# Altium PCB WiFiChessPCB.PcbDoc
Units mm, origin at the board's own origin, x right, y up, seen from the top; angles counter-clockwise.
Board outline 100 x 100 mm, 2 copper layers (Top Layer, Bottom Layer); 86 components, 76 nets, 360 pads, 231 vias.
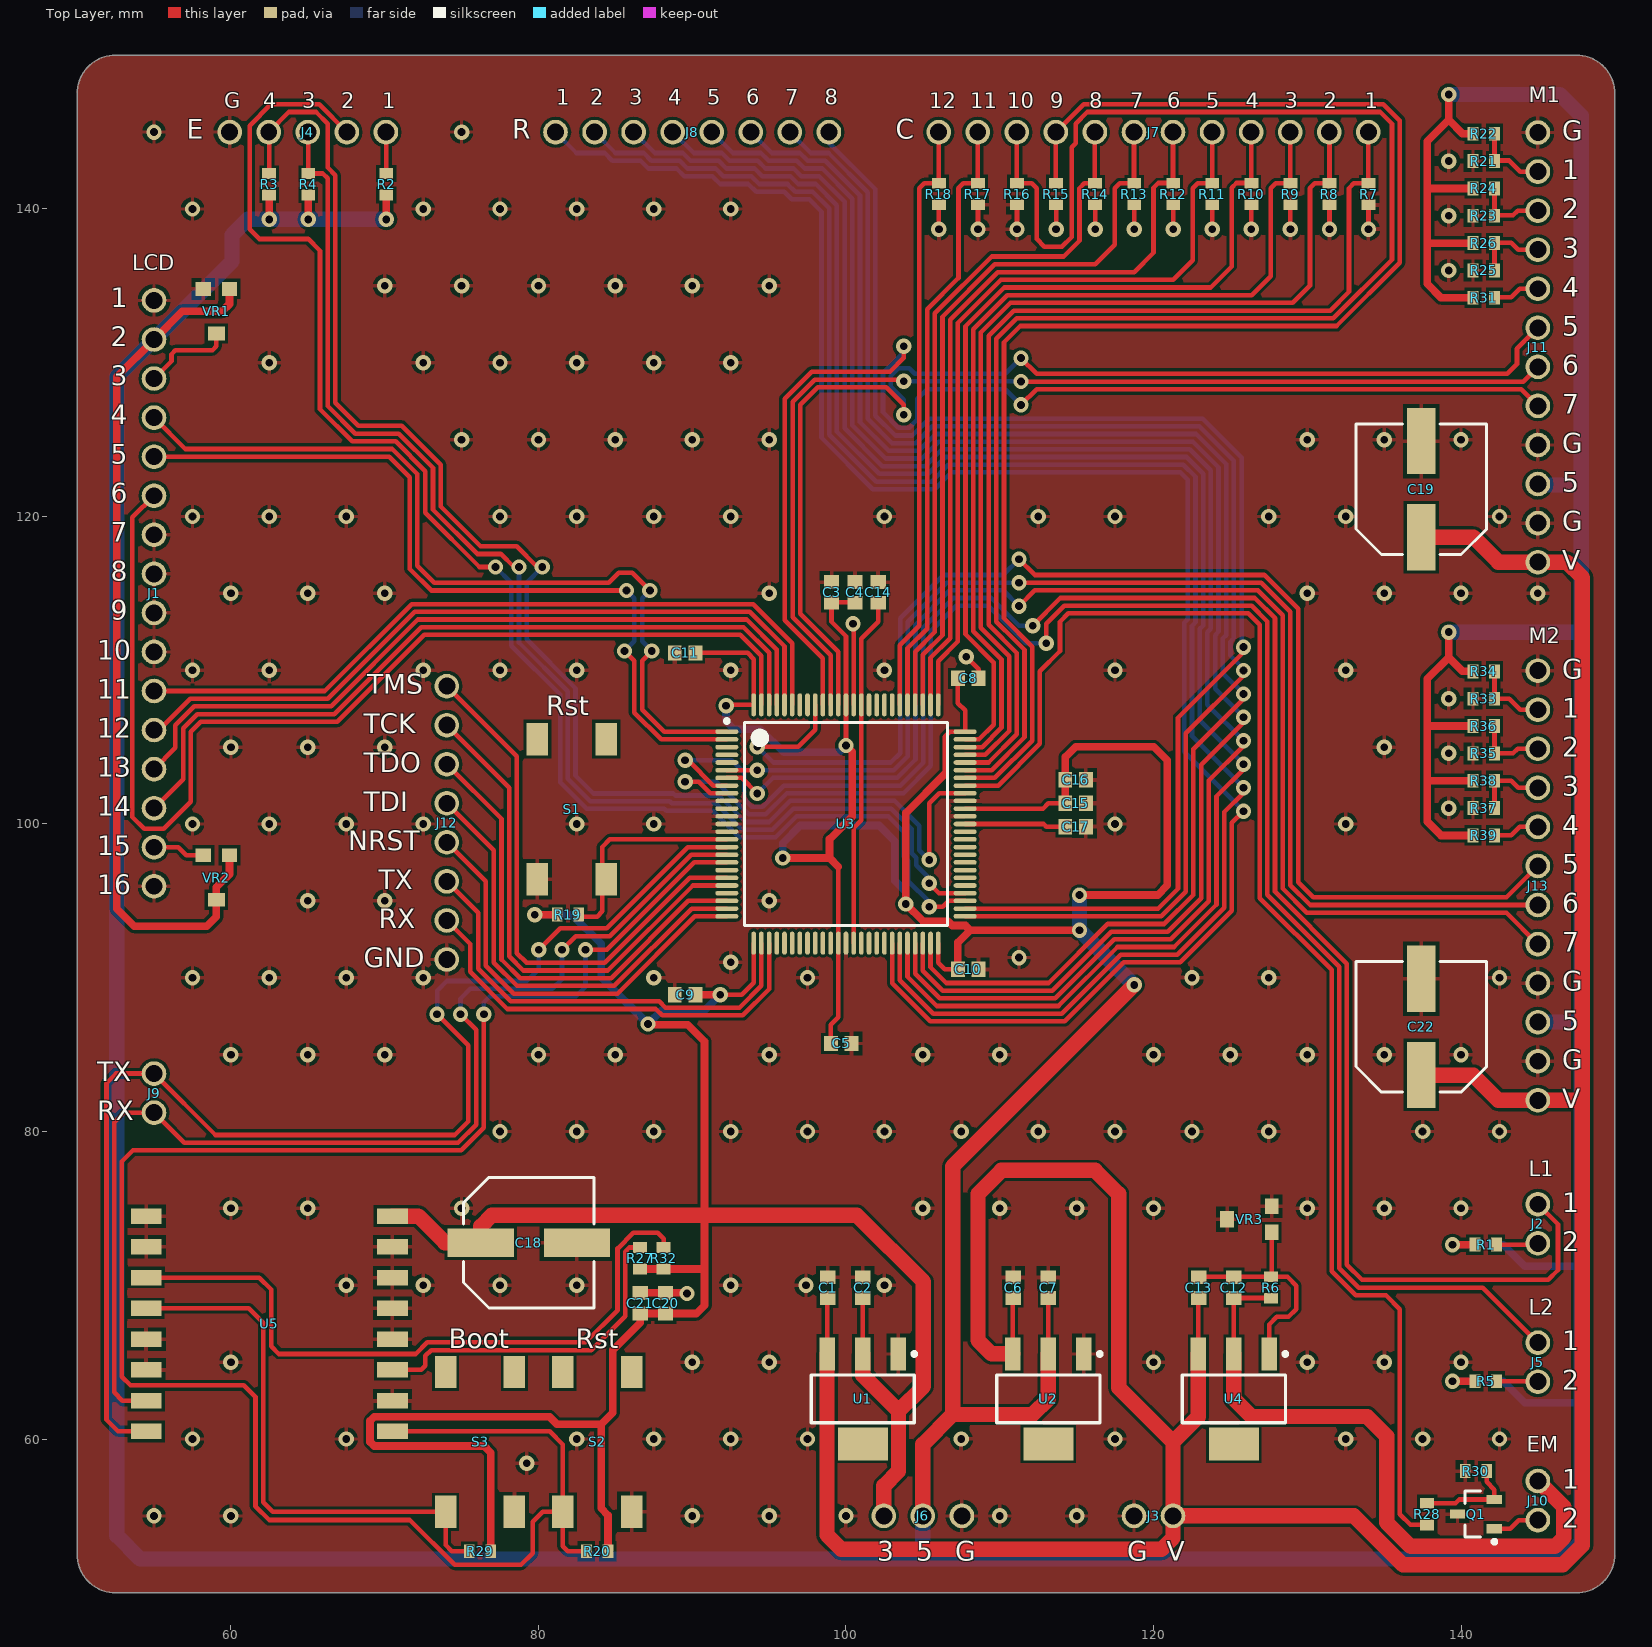
[diagram p0: Top Layer view]
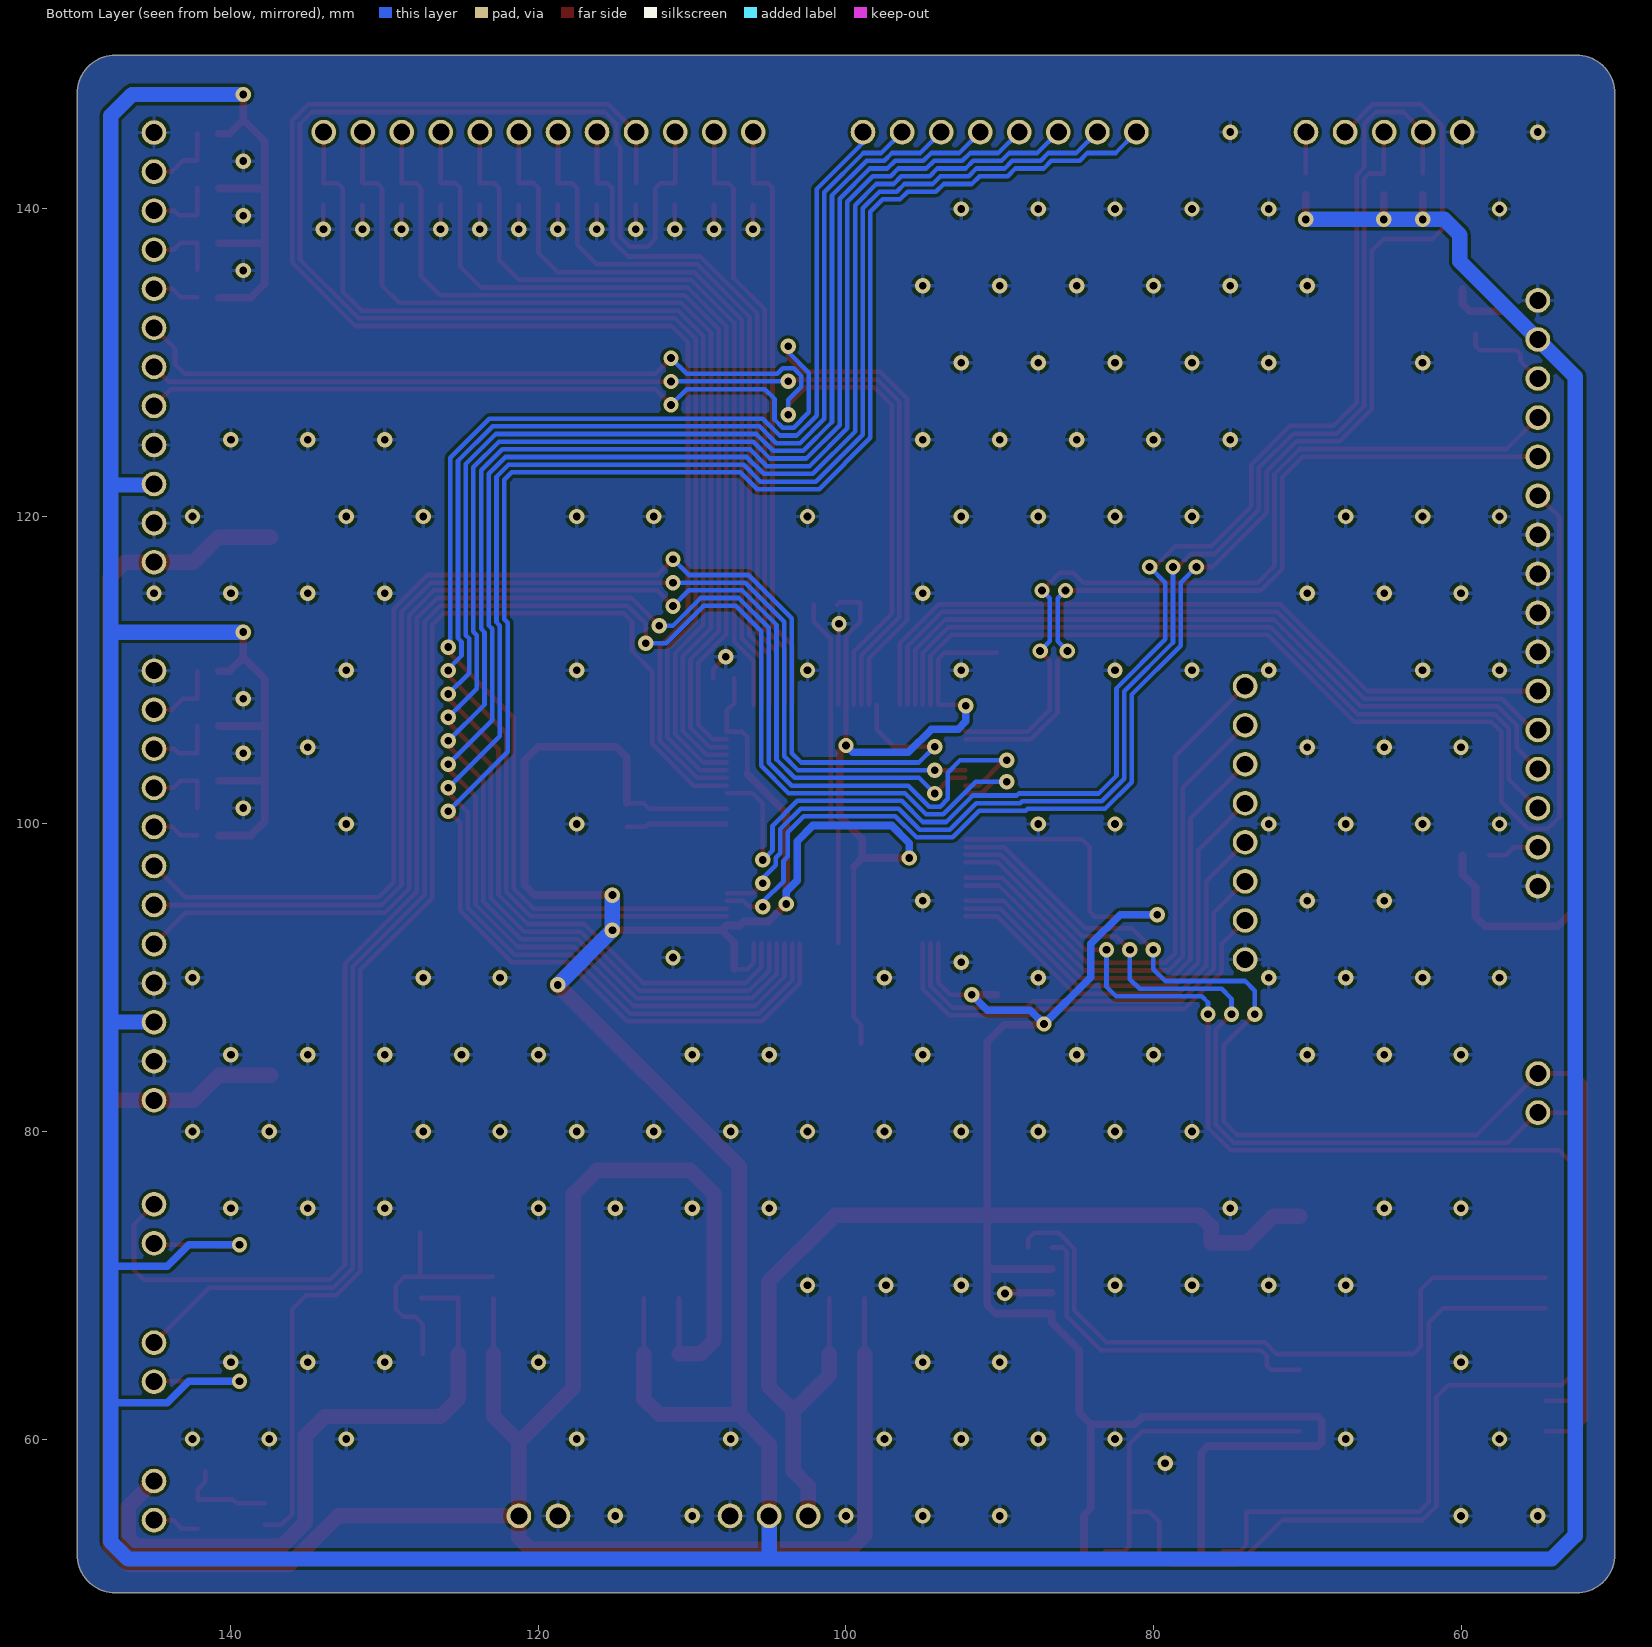
[diagram p1: Bottom Layer view, seen from below]

## Layer stack, top to bottom
Top Solder: solder mask 0.0102, Solder Resist, Dk 3.5
Top Layer: signal copper 0.0356
Dielectric 1: dielectric 0.32, FR-4, Dk 4.8
Bottom Layer: signal copper 0.0356
Bottom Solder: solder mask 0.0102, Solder Resist, Dk 3.5

## Board outline
50,52.5 50,147.5 cw(c52.5,147.5) 52.5,150 147.5,150 cw(c147.5,147.5) 150,147.5 150,52.5 cw(c147.5,52.5) 147.5,50 52.5,50 cw(c52.5,52.5)

## Design rules (kind name [scope] priority, off if disabled: settings)
Clearance [All] p1: gap=0.2
HoleSize [All] p1: absolutevalues=TRUE maxlimit=6.35 minlimit=0.3 maxpercent=80.000 minpercent=20.000
HoleToHoleClearance [All] p1: gap=0.25 allowstackedmicrovias=TRUE
MinimumSolderMaskSliver [All] p1: minsoldermaskwidth=0.125
PlaneClearance [All] p1: clearance=0.5
PlaneConnect [All] p1: planeconnectstyle=Relief reliefexpansion=0.5 reliefentries=4 reliefconductorwidth=0.25 reliefairgap=0.25
PolygonConnect [All] p1: connectstyle=Relief reliefconductorwidth=0.25 reliefentries=4 polygonreliefangle="90 Angle" airgapwidth=0.25
RoutingCorners [All] p1: cornerstyle=45-Degree minsetback=2.5 maxsetback=2.5
RoutingVias [All] p1: holewidth=0.5 width=1 viastyle="Through Hole" minholewidth=0.5 minwidth=1 maxholewidth=2 maxwidth=5
SilkToSilkClearance [All] p1: silktosilkclearance=0.125
SilkToSolderMaskClearance [IsPad] p1: minsilkscreentomaskgap=0.125 clearancetoexposedcopper=TRUE
SolderMaskExpansion [All] p1: expansion=0.1
Width [All] p1: maxlimit=3 minlimit=0.2 preferedwidth=0.3
22 further rules are at their usual default settings.

## Components (designator, comment, footprint, x,y, rotation, side; value= is the part's Value field where it differs from the comment)
C1 "10uF" CAP0603 98.806,69.85 r90 top
C2 "10uF" CAP0603 101.092,69.85 r270 top
C3 "1uF" CAP0603 99.06,115.062 r270 top
C4 "100nF" CAP0603 100.584,115.062 r270 top
C5 "100nF" CAP0603 99.695,85.725 r180 top
C6 "10uF" CAP0603 110.871,69.85 r90 top
C7 "10uF" CAP0603 113.157,69.85 r270 top
C8 "100nF" CAP0603 107.95,109.474 r180 top
C9 "100nF" CAP0603 89.535,88.9 r0 top
C10 "100nF" CAP0603 107.95,90.551 r180 top
C11 "100nF" CAP0603 89.535,111.125 r0 top
C12 "10uF" CAP0603 125.222,69.85 r270 top
C13 "10uF" CAP0603 122.936,69.85 r90 top
C14 "1uF" CAP0603 102.108,115.062 r270 top
C15 "1uF" CAP0603 114.935,101.346 r180 top
C16 "100nF" CAP0603 114.935,102.87 r180 top
C17 "1uF" CAP0603 114.935,99.822 r180 top
C18 "47uF" CAP_EL_8x5.9 79.375,72.771 r0 top
C19 "47uF" CAP_EL_8x5.9 137.414,121.777 r90 top
C20 "100nF" CAP0603 88.265,68.834 r270 top
C21 "1uF" CAP0603 86.614,68.834 r270 top
C22 "47uF" CAP_EL_8x5.9 137.414,86.812 r90 top
J1 "Header_16" "16 Pin Header 2.54mm" 55,115 r270 top
J2 "Header_2" "2 Pin Header 2.54mm" 145,74 r90 top
J3 "Header_2" "2 Pin Header 2.54mm" 120,55 r180 top
J4 "Header_5" "5 Pin Header 2.54mm" 65,145 r180 top
J5 "Header_2" "2 Pin Header 2.54mm" 145,65 r90 top
J6 "Header_3" "3 Pin Header 2.54mm" 105,55 r0 top
J7 "Header_12" "12 Pin Header 2.54mm" 120,145 r180 top
J8 "Header_8" "8 Pin Header 2.54mm" 90,145 r0 top
J9 "Header_2" "2 Pin Header 2.54mm" 55,82.5 r270 top
J10 "Header_2" "2 Pin Header 2.54mm" 145,56 r270 top
J11 "Header_12" "12 Pin Header 2.54mm" 145,131 r270 top
J12 "Header_8" "8 Pin Header 2.54mm" 74.041,100.076 r270 top
J13 "Header_12" "12 Pin Header 2.54mm" 145,96 r270 top
Q1 "PMV20ENR" SOT23 140.97,55.118 r180 top
R1 "10K" RES0603 141.605,72.644 r180 top
R2 "10K" RES0603 70.104,141.605 r270 top
R3 "10K" RES0603 62.484,141.605 r270 top
R4 "10K" RES0603 65.024,141.605 r270 top
R5 "10K" RES0603 141.605,63.754 r180 top
R6 "100R" RES0603 127.635,69.85 r270 top
R7 "10K" RES0603 133.985,140.97 r90 top
R8 "10K" RES0603 131.445,140.97 r90 top
R9 "10K" RES0603 128.905,140.97 r90 top
R10 "10K" RES0603 126.365,140.97 r90 top
R11 "10K" RES0603 123.825,140.97 r90 top
R12 "10K" RES0603 121.285,140.97 r90 top
R13 "10K" RES0603 118.745,140.97 r90 top
R14 "10K" RES0603 116.205,140.97 r90 top
R15 "10K" RES0603 113.665,140.97 r90 top
R16 "10K" RES0603 111.125,140.97 r90 top
R17 "10K" RES0603 108.585,140.97 r90 top
R18 "10K" RES0603 106.045,140.97 r90 top
R19 "10K" RES0603 81.915,94.107 r180 top
R20 "10K" RES0603 83.82,52.705 r180 top
R21 "10K" RES0603 141.478,143.113 r0 top
R22 "DNP" RES0603 141.478,144.891 r180 top
R23 "10K" RES0603 141.478,139.557 r0 top
R24 "DNP" RES0603 141.478,141.335 r180 top
R25 "10K" RES0603 141.478,136.001 r0 top
R26 "DNP" RES0603 141.478,137.779 r180 top
R27 "10K" RES0603 86.614,71.755 r270 top
R28 "10R" RES0603 137.795,55.118 r90 top
R29 "10K" RES0603 76.2,52.705 r180 top
R30 "10K" RES0603 140.97,57.912 r0 top
R31 "10K" RES0603 141.478,134.223 r180 top
R32 "10K" RES0603 88.138,71.755 r270 top
R33 "10K" RES0603 141.478,108.148 r0 top
R34 "DNP" RES0603 141.478,109.926 r180 top
R35 "10K" RES0603 141.478,104.592 r0 top
R36 "DNP" RES0603 141.478,106.37 r180 top
R37 "10K" RES0603 141.478,101.036 r0 top
R38 "DNP" RES0603 141.478,102.814 r180 top
R39 "10K" RES0603 141.478,99.258 r180 top
S1 "NO-Tactile Switch" FSM2JSMAATR 82.169,100.965 r90 top
S2 "NO-Tactile Switch" FSM2JSMAATR 83.82,59.817 r90 top
S3 "NO-Tactile Switch" FSM2JSMAATR 76.2,59.817 r90 top
U1 "3.3V" SOT223 101.092,62.611 r270 top
U2 "5V" SOT223 113.157,62.611 r270 top
U3 "CY8C5287AXI" TQPF-100 100,100 r0 top
U4 "1-18V" SOT223 125.222,62.611 r270 top
U5 "ESP8266_07" ESP-07 62.5,67.5 r180 top
VR1 "10K" RESPVZ3A 59.055,133.35 r180 top
VR2 "1K" RESPVZ3A 59.055,96.52 r180 top
VR3 "1K" RESPVZ3A 126.238,74.295 r90 top

## Footprints (in the part's own frame and the unit in brackets; to place one, negate y for a bottom-side part, rotate by r counter-clockwise, add the part's x,y. Pads: shape width x height; smd on the part's side, far side on the other; paste and mask are expansions set on the pad)
"2 Pin Header 2.54mm" [mm]
  round 1.6 hole 1.1: 1(-1.27,0) 2(1.27,0)
"3 Pin Header 2.54mm" [mm]
  round 1.6 hole 1.1: 1(-2.54,0) 2(0,0) 3(2.54,0)
"5 Pin Header 2.54mm" [mm]
  round 1.6 hole 1.1: 1(-5.08,0) 2(-2.54,0) 3(0,0) 4(2.54,0) 5(5.08,0)
"8 Pin Header 2.54mm" [mm]
  round 1.6 hole 1.1: 1(-8.89,0) 2(-6.35,0) 3(-3.81,0) 4(-1.27,0) 5(1.27,0) 6(3.81,0) 7(6.35,0) 8(8.89,0)
"12 Pin Header 2.54mm" [mm]
  round 1.6 hole 1.1: 1(-13.97,0) 2(-11.43,0) 3(-8.89,0) 4(-6.35,0) 5(-3.81,0) 6(-1.27,0) 7(1.27,0) 8(3.81,0) 9(6.35,0) 10(8.89,0) 11(11.43,0) 12(13.97,0)
"16 Pin Header 2.54mm" [mm]
  round 1.6 hole 1.1: 1(-19.05,0) 2(-16.51,0) 3(-13.97,0) 4(-11.43,0) 5(-8.89,0) 6(-6.35,0) 7(-3.81,0) 8(-1.27,0) 9(1.27,0) 10(3.81,0) 11(6.35,0) 12(8.89,0) 13(11.43,0) 14(13.97,0) 15(16.51,0) 16(19.05,0)
CAP0603 [mm]
  rect 0.9x1 smd: 1(-0.675,0) 2(0.675,0)
  body extent -0.87,-0.48 0.87,0.47, height 0.6
CAP_EL_8x5.9 [mm] "Aluminum Electrolytic Capacitor, Body 8.30x8.30x5.90mm, IPC Low Density"
  rect 4.3x1.85 smd: 1(-3.125,0) 2(3.125,0)
  silkscreen extent -4.25,-4.25 4.25,4.25, body extent -4.25,-4.25 4.25,4.25, height 5.9
ESP-07 [mm] "ESP8266 Version 7 Footprint"
  rect 2x1 smd: 1(-8,7) 2(-8,5) 3(-8,3) 4(-8,1) 5(-8,-1) 6(-8,-3) 7(-8,-5) 8(-8,-7) 9(8,-7) 10(8,-5) 11(8,-3) 12(8,-1) 13(8,1) 14(8,3) 15(8,5) 16(8,7)
FSM2JSMAATR [mm] "FSM2JSMAATR Tactile Switch"
  rect 2.1x1.4 smd: 1(-4.55,2.24) 2(-4.55,-2.24) 3(4.55,2.24) 4(4.55,-2.24)
  body extent -3,-3 3,3, height 4
RES0603 [mm] "Chip Resistor, 2-Leads, Body 1.60x0.80mm, IPC Medium Density"
  rect 0.7x0.9 smd: 1(-0.7,0) 2(0.7,0)
  body extent -0.85,-0.45 0.85,0.45, height 0.55
RESPVZ3A [mm] "PVZ3A Trimmer Potentiometer"
  rect 1x0.9 smd: 1(-0.85,-1.45) 3(0.85,-1.45)
  rect 1.1x0.9 smd: 2(0,1.45)
SOT23 [mm] "SOT23, 3-Leads, Body 2.90x2.45mm, Pitch 0.95mm, IPC Medium Density"
  rect 1x0.6 smd: 1(-1.2,0.95) 2(-1.2,-0.95) 3(1.2,0)
  silkscreen extent -1.33,-1.5 0.7,1.92, body extent -0.7,-1.5 0.7,1.5, height 1.1
SOT223 [mm] "SOT223, 4-Leads, Body 6.50x7.00mm (avg), Pitch 2.30mm, IPC Medium Density"
  rect 2.15x1 smd: 1(-2.925,2.3) 2(-2.925,0) 3(-2.925,-2.3)
  rect 2.15x3.25 smd: 4(2.925,0)
  silkscreen extent -3.05,-3.35 1.55,3.48, body extent -1.85,-3.35 1.85,3.35, height 1.8
TQPF-100 [mm] "TSQFP, 100-Leads, Body 14.00x14.00mm, Pitch 0.50mm, IPC Medium Density"
  oval 1.5x0.3 smd mask+0.025: 1(-7.75,6) 2(-7.75,5.5) 3(-7.75,5) 4(-7.75,4.5) 5(-7.75,4) 6(-7.75,3.5) 7(-7.75,3) 8(-7.75,2.5) 9(-7.75,2) 10(-7.75,1.5) 11(-7.75,1) 12(-7.75,0.5) 13(-7.75,0) 14(-7.75,-0.5) 15(-7.75,-1) 16(-7.75,-1.5) 17(-7.75,-2) 18(-7.75,-2.5) 19(-7.75,-3) 20(-7.75,-3.5) 21(-7.75,-4) 22(-7.75,-4.5) 23(-7.75,-5) 24(-7.75,-5.5) 25(-7.75,-6) 51(7.75,-6) 52(7.75,-5.5) 53(7.75,-5) 54(7.75,-4.5) 55(7.75,-4) 56(7.75,-3.5) 57(7.75,-3) 58(7.75,-2.5) 59(7.75,-2) 60(7.75,-1.5) 61(7.75,-1) 62(7.75,-0.5) 63(7.75,0) 64(7.75,0.5) 65(7.75,1) 66(7.75,1.5) 67(7.75,2) 68(7.75,2.5) 69(7.75,3) 70(7.75,3.5) 71(7.75,4) 72(7.75,4.5) 73(7.75,5) 74(7.75,5.5) 75(7.75,6)
  oval 0.3x1.5 smd mask+0.025: 26(-6,-7.75) 27(-5.5,-7.75) 28(-5,-7.75) 29(-4.5,-7.75) 30(-4,-7.75) 31(-3.5,-7.75) 32(-3,-7.75) 33(-2.5,-7.75) 34(-2,-7.75) 35(-1.5,-7.75) 36(-1,-7.75) 37(-0.5,-7.75) 38(0,-7.75) 39(0.5,-7.75) 40(1,-7.75) 41(1.5,-7.75) 42(2,-7.75) 43(2.5,-7.75) 44(3,-7.75) 45(3.5,-7.75) 46(4,-7.75) 47(4.5,-7.75) 48(5,-7.75) 49(5.5,-7.75) 50(6,-7.75) 76(6,7.75) 77(5.5,7.75) 78(5,7.75) 79(4.5,7.75) 80(4,7.75) 81(3.5,7.75) 82(3,7.75) 83(2.5,7.75) 84(2,7.75) 85(1.5,7.75) 86(1,7.75) 87(0.5,7.75) 88(0,7.75) 89(-0.5,7.75) 90(-1,7.75) 91(-1.5,7.75) 92(-2,7.75) 93(-2.5,7.75) 94(-3,7.75) 95(-3.5,7.75) 96(-4,7.75) 97(-4.5,7.75) 98(-5,7.75) 99(-5.5,7.75) 100(-6,7.75)
  silkscreen extent -7.87,-6.6 6.6,6.82, body extent -7,-7 7,7, height 1.6

## Part data
C1 C2 C6 C7 C12 C13: library part Cap_10uF_0603
C3 C14 C15 C17 C21: library part Cap_1uF_0603
C4 C5 C8 C9 C10 C11 C16 C20: library part Cap_100nF_0603
C18 C19 C22: library part Cap_47uF_Alu
J1: "16 pin header"
J2 J3 J5 J9 J10: "2 Pin Header"
J4: "5 Pin Header"
J6: "3 Pin Header"
J7 J11 J13: "12 Pin Header"
J8 J12: "8 Pin Header"
Q1: "Logic Level P-FET"
R1 R2 R3 R4 R5 R7 R8 R9 R10 R11 R12 R13 R14 R15 R16 R17 R18 R19 R20 R21 R23 R25 R27 R29 R30 R31 R32 R33 R35 R37 R39: library part Res_10K_0603, "Resistor"
R6: library part Res_100R_0603_1, "Resistor"
R22 R24 R26 R34 R36 R38: library part Res_0603_DNP, "Resistor"
R28: library part Res_10R_0603, "Resistor"
S1 S2 S3: "Switch"
U1: library part NCP1117ST33T3G, "3.3V_800mA_Linear"
U2: library part NCV1117ST50T3G, "5V_1A_Linear"
U3: "Cypress CY8C52 PSoC 5"
U4: library part NCV1117STAT3G, "Adj_1A_Linear"
U5: "ESP-07 WiFi Module"
VR1: library part PVZ3A_10K_Trimmer_Pot
VR2 VR3: library part PVZ3A_1K_Trimmer_Pot

## Via types
v1: diameter 1, hole 0.5, Top Layer to Bottom Layer, tented both sides, 231 vias

## Nets (pads, with @x,y where several pads share a name; then routed paths per layer and width w, separated by ;. In a path a pad name is that pad's centre, name@x,y a point inside that pad or via, vN(x,y) a via of type N, cw(c..) or ccw(c..) an arc to the next point about the centre after c; other vN are vias at no path point)
3.3V: C2.2 C9.2 C18.1 C20.2 C21.2 J6.1 R19.2 R20.1 R27.2 R29.1 R32.2 U1.2 U3.26 U5.8 | length 166
  Top Layer w0.3: v1(91.821,88.9) 93.218,88.9 94,89.682 U3.26 ; U1.2 C2.2
  Top Layer w0.5: R29.1 76.9,59.117 76.467,59.55 69.314,59.55 69.05,59.814 69.05,61.186 69.314,61.45 80.717,61.45 81.207,60.96 84.074,60.96 ; v1(79.756,94.107) R19.2 ; R20.1 84.52,55.053 84.074,55.499 84.074,60.96 ; R27.2 R32.2 90.74,71.055 ; v1(87.122,86.995) 87.167,86.95 89.707,86.95 90.805,85.852 90.805,74.549 90.805,68.707 90.257,68.159 C20.2 C21.2 86.614,67.564 84.836,65.786 84.836,61.722 84.074,60.96 ; C9.2 v1(91.821,88.9)
  Top Layer w1: U5.8 72.185,74.5 73.914,72.771 C18.1 76.25,73.837 76.962,74.549 90.805,74.549 100.711,74.549 105.029,70.231 105.029,63.422 103.417,61.81 ; U1.2 101.092,64.135 103.417,61.81 ; J6.1 102.46,56.954 103.417,57.911 103.417,61.81
  Bottom Layer w0.5: v1(79.756,94.107) 82.169,94.107 84.074,92.202 84.074,90.043 v1(87.122,86.995) 88.011,87.884 90.805,87.884 v1(91.821,88.9)
5V: C3.2 C4.2 C5.2 C7.2 C8.2 C10.2 C11.2 C15.2 C16.2 J1.2 J6.2 J11.10 J13.10 R1.2 R2.2 R3.2 R4.2 R5.2 R22.2 R24.2 R26.2 R31.2 R34.2 R36.2 R38.2 R39.2 U2.2 U3.37 U3.50 U3.65 U3.75 U3.88 U3.100 VR1.1 VR2.1 VR2.2 | length 637.1
  Top Layer w0.3: C11.2 93.599,111.125 94,110.724 U3.100 v1@92.256,107.75 ; C5.2 99.02,86.955 99.5,87.435 U3.37 99.5,97.223 ; v1(100,105.105) U3.88 100,112.217 99.06,113.157 99.06,114.427 100.417,114.427 C4.2@100.584,114.26 ; U3.50 106,90.977 106.426,90.551 C10.2 ; 106.426,103.251 106.426,105.664 106.762,106 U3.75 107.75,107.388 107.275,107.863 C8.2 ; U3.65 112.811,101 113.157,101.346 C15.2 ; U2.2 C7.2
  Top Layer w0.5: VR2.1 59.905,96.735 59.055,95.885 VR2.2 59.055,93.98 58.42,93.345 53.721,93.345 52.578,94.488 52.578,129.088 J1.2 56.84,133.35 59.436,133.35 59.905,133.819 VR1.1 ; v1(62.484,139.319) R3.2 ; v1(65.024,139.319) R4.2 ; v1(70.104,139.319) R2.2 ; v1(95.885,97.79) 98.933,97.79 ; 99.5,97.223 98.933,97.79 ; v1(100,105.105) 100.4,104.705 100.4,100.487 98.933,99.02 98.933,97.79 ; 106.426,103.251 103.886,100.711 v1(103.886,94.795) 105.016,93.665 106.636,93.665 106.901,93.4 107.768,93.4 108.077,93.091 ; C10.2 107.275,92.289 108.077,93.091 ; C15.2 C16.2 114.26,104.354 114.935,105.029 120.015,105.029 120.904,104.14 120.904,96.012 120.269,95.377 v1(115.189,95.377) ; v1(115.189,93.091) 108.077,93.091 ; 137.811,102.814 R38.2 ; 137.811,106.37 R36.2 ; 137.811,137.779 R26.2 ; 137.811,141.335 R24.2 ; v1(139.192,112.482) 139.192,110.831 ; v1(139.192,147.447) 139.192,145.796 ; v1(139.446,63.754) R5.2 ; v1(139.446,72.644) R1.2 ; R39.2 138.7,99.258 137.795,100.163 137.795,109.434 139.192,110.831 ; R34.2 140.097,109.926 139.192,110.831 ; R31.2 138.7,134.223 137.795,135.128 137.795,144.399 139.192,145.796 ; R22.2 140.097,144.891 139.192,145.796
  Top Layer w1: J6.2 105,59.661 106.934,61.595 ; U2.2 113.157,62.611 112.141,61.595 106.934,61.595 ; v1(118.745,89.535) 106.934,77.724 106.934,61.595
  Bottom Layer w0.5: v1(92.202,107.696) 92.202,106.68 92.71,106.172 94.435,106.172 95.946,104.66 99.556,104.66 v1(100,105.105) ; v1(95.885,97.79) 95.885,98.753 97.032,99.9 102.157,99.9 103.175,98.882 103.175,96.323 103.886,95.612 v1(103.886,94.795) ; v1(139.446,63.754) 142.748,63.754 144.145,62.357 147.828,62.357 ; v1(139.446,72.644) 142.748,72.644 144.145,71.247 147.828,71.247
  Bottom Layer w1: v1(70.104,139.319) v1(65.024,139.319) v1(62.484,139.319) 61.087,139.319 60.071,138.303 60.071,136.581 J1.2 52.578,129.088 52.578,53.721 54.102,52.197 146.685,52.197 147.828,53.34 147.828,71.247 147.828,87.122 ; 105,52.197 J6.2 ; v1(115.189,95.377) v1(115.189,93.091) v1(118.745,89.535) ; v1(139.192,112.482) 147.741,112.482 ; v1(139.192,147.447) 146.431,147.447 147.828,146.05 147.828,122.047 ; J13.10@145.012,87.122 147.828,87.122 ; J11.10@145.063,122.047 147.828,122.047 ; 147.828,87.122 147.828,122.047
12V: C1.1 C6.1 C13.1 C19.1 C22.1 J3.1 J11.12 J13.12 U1.3 U2.3 U4.3 | length 212.8
  Top Layer w0.3: U1.3 C1.1@98.792,69.161 ; U2.3 C6.1@110.857,69.161 ; U4.3 C13.1@122.922,69.161
  Top Layer w1: U1.3@98.767,65.536 98.767,53.76 99.695,52.832 120.523,52.832 121.27,53.579 J3.1 ; U2.3 109.47,65.536 108.585,66.421 108.585,75.946 110.109,77.47 116.205,77.47 117.729,75.946 117.729,63.343 121.27,59.802 ; U4.3 122.922,61.454 121.27,59.802 ; C22.1@137.414,83.652 140.809,83.652 142.431,82.03 J13.12 147.873,82.03 ; C19.1 140.809,118.652 142.431,117.03 J11.12 146.876,117.03 147.885,116.021 147.885,53.097 146.604,51.816 136.225,51.816 133.041,55 J3.1 ; J3.1 121.27,59.802
DIR_1: J11.8 U3.91 | length 81.5
  Top Layer w0.3: U3.91 98.5,110.779 96.028,113.251 96.028,127.668 97.773,129.413 102.862,129.413 103.759,130.31 v1(103.759,131.064) ; v1(111.379,127.254) 112.395,128.27 143.92,128.27 J11.8
  Bottom Layer w0.3: v1(103.759,131.064) 103.759,130.695 102.409,129.345 102.409,126.767 103.407,125.769 104.111,125.769 104.648,126.306 104.648,127.651 105.283,128.286 110.347,128.286 v1(111.379,127.254)
DIR_2: J13.8 U3.7 | length 84.6
  Top Layer w0.3: U3.7 93.215,103 v1(94.234,101.981) ; v1(111.252,114.173) 112.276,115.197 126.793,115.197 128.405,113.585 128.405,95.805 129.98,94.23 142.96,94.23 J13.8
  Bottom Layer w0.3: v1(94.234,101.981) 95.253,103 103.326,103 104.521,104.195 104.521,112.958 106.76,115.197 110.228,115.197 v1(111.252,114.173)
EM: R28.1 U3.68 | length 92.8
  Top Layer w0.3: U3.68 109.893,102.5 112.611,105.219 112.611,109.944 113.919,111.252 113.919,113.157 114.459,113.697 126.172,113.697 126.905,112.964 126.905,95.184 131.58,90.509 131.58,70.913 133.143,69.35 135.12,69.35 136.017,68.453 136.017,55.118 136.717,54.418 R28.1
ENC_A: J4.3 R4.1 U3.54 | length 83.8
  Top Layer w0.3: J4.3@65.024,144.976 R4.1 65.975,142.305 66.294,141.986 66.294,127.182 68.086,125.39 70.914,125.39 73.144,123.16 73.144,120.443 76.024,117.563 77.56,117.563 78.41,116.713 v1(78.732,116.713) ; v1(105.41,96.139) 106.049,95.5 U3.54
  Bottom Layer w0.3: v1(78.732,116.713) 78.732,111.807 81.907,108.632 81.907,102.933 83.359,101.481 88.546,101.481 88.673,101.354 91.538,101.354 93.261,99.631 95.207,99.631 96.576,101 102.95,101 104.275,99.675 104.275,98.091 104.56,97.806 104.56,97.311 105.41,96.461 v1(105.41,96.139)
ENC_B: J4.4 R3.1 U3.67 | length 94.1
  Top Layer w0.3: J4.4 63.764,146.304 65.532,146.304 66.294,145.542 66.294,142.693 66.794,142.193 66.794,127.389 68.293,125.89 71.121,125.89 73.644,123.367 73.644,120.65 76.231,118.063 78.584,118.063 79.934,116.713 v1(80.256,116.713) ; R3.1 J4.4@62.484,144.976 ; v1(105.41,97.663) 105.41,101.346 106.064,102 U3.67
  Bottom Layer w0.3: v1(80.256,116.713) 79.232,115.689 79.232,112.014 82.407,108.839 82.407,103.14 83.566,101.981 88.773,101.981 88.9,101.854 91.745,101.854 93.468,100.131 95,100.131 96.369,101.5 103.157,101.5 104.775,99.882 104.775,98.298 v1(105.41,97.663)
ENC_SW: J4.2 U3.53 | length 95.7
  Top Layer w0.3: J4.2 67.54,145.003 65.739,146.804 62.603,146.804 61.214,145.415 61.214,138.684 61.849,138.049 65.024,138.049 65.794,137.279 65.794,126.975 67.879,124.89 70.707,124.89 72.644,122.953 72.644,120.236 76.167,116.713 v1(77.208,116.713) ; v1(105.41,94.615) 106.299,94.615 106.684,95 U3.53
  Bottom Layer w0.3: v1(77.208,116.713) 78.232,115.689 78.232,111.6 81.407,108.425 81.407,102.726 83.152,100.981 88.193,100.981 88.32,100.854 91.331,100.854 93.054,99.131 95.414,99.131 96.783,100.5 102.743,100.5 103.775,99.468 103.775,97.884 104.06,97.599 104.06,96.287 105.41,94.937 v1(105.41,94.615)
ESP_RST: R20.2 S2.1 U3.18 U5.1 | length 127.9
  Top Layer w0.3: U5.1 80.724,60.5 81.58,59.644 S2.1 ; v1(76.454,87.63) 76.454,80.254 74.975,78.775 53.629,78.775 52.905,78.051 52.905,64.062 53.467,63.5 60.833,63.5 61.595,62.738 61.595,55.626 62.484,54.737 71.628,54.737 74.549,51.816 78.867,51.816 79.629,52.578 79.629,54.61 80.286,55.267 S2.1 ; v1@83.058,91.694 v1(83.058,91.821) 84.455,91.821 90.134,97.5 U3.18 ; R20.2 81.915,52.705 81.58,53.04 S2.1
  Bottom Layer w0.3: v1(76.454,87.63) 76.454,88.392 76.851,88.789 82.439,88.789 83.058,89.408 v1(83.058,91.821)
ESP_RX: J9.2 U3.17 U5.15 | length 75.9
  Top Layer w0.3: U5.15 52.943,62.5 52.405,63.038 52.405,80.599 53.036,81.23 J9.2 56.955,79.275 74.768,79.275 75.946,80.453 75.946,86.614 v1(74.93,87.63) ; v1(81.534,91.821) 82.423,92.71 84.637,92.71 89.927,98 U3.17
  Bottom Layer w0.3: v1(74.93,87.63) 74.93,88.646 75.573,89.289 80.907,89.289 81.534,89.916 v1(81.534,91.821)
ESP_TX: J9.1 U3.16 U5.16 | length 83.4
  Top Layer w0.3: U5.16 52.657,60.5 51.905,61.252 51.905,83.147 52.528,83.77 J9.1 58.995,79.775 74.561,79.775 75.438,80.652 75.438,85.598 v1(73.406,87.63) ; v1(80.01,91.821) 81.407,93.218 84.438,93.218 89.72,98.5 U3.16
  Bottom Layer w0.3: v1(73.406,87.63) 73.406,89.154 74.041,89.789 79.248,89.789 80.01,90.551 v1(80.01,91.821)
GND: C1.2 C2.1 C3.1 C4.1 C5.1 C6.2 C7.1 C8.1 C9.1 C10.1 C11.1 C14.1 C15.1 C16.1 C17.1 C18.2 C19.2 C20.1 C21.1 C22.2 J1.1 J1.7 J1.8 J1.9 J1.10 J1.16 J3.2 J4.5 J6.3 J11.1 J11.9 J11.11 J12.8 J13.1 J13.9 J13.11 Q1.3 R7.1 R8.1 R9.1 R10.1 R11.1 R12.1 R13.1 R14.1 R15.1 R16.1 R17.1 R18.1 R21.1 R23.1 R25.1 R30.1 R33.1 R35.1 R37.1 S1.1 S2.2 S3.2 U1.1 U2.1 U3.10 U3.12 U3.13 U3.14 U3.38 U3.64 U3.66 U3.87 U5.2 U5.4 U5.5 U5.6 U5.7 U5.9 U5.10 U5.13 U5.14 VR1.3 VR3.2 VR3.3 | length 29.2
  Top Layer w0.3: J12.8 J12.8@74.1,91.186 ; v1@89.622,69.509 cw(c89.622,69.469) v1(89.662,69.469) ; v1(100.457,113.03) cw(c100.457,112.987) 100.5,112.987 U3.87 ; v1(106.045,138.684) R18.1 ; v1(107.823,110.871) 108.625,110.069 C8.1 ; v1(108.585,138.684) R17.1 ; v1(111.125,138.684) R16.1 ; v1(113.665,138.684) R15.1 ; v1(116.205,138.684) R14.1 ; v1(118.745,138.684) R13.1 ; v1(121.285,138.684) R12.1 ; v1(123.825,138.684) R11.1 ; v1(126.365,138.684) R10.1 ; v1(128.905,138.684) R9.1 ; v1(131.445,138.684) R8.1 ; v1(133.985,138.684) R7.1
  Top Layer w0.5: C21.1 C20.1 v1@89.622,69.509
  other v1: 55,55 60,55 90,55 95,55 100,55 110,55 115,55 79.248,58.42 57.5,60 67.5,60 82.5,60 87.5,60 92.5,60 97.5,60 107.5,60 117.5,60 132.5,60 137.5,60 142.5,60 60,65 90,65 95,65 120,65 130,65 135,65 140,65 67.5,70 72.5,70 77.5,70 82.5,70 92.5,70 97.4,70 102.5,70 60,75 65,75 75,75 105,75 110,75 115,75 120,75 130,75 135,75 140,75 77.5,80 82.5,80 87.5,80 92.5,80 97.5,80 102.5,80 107.5,80 112.5,80 117.5,80 122.5,80 127.5,80 137.5,80 142.5,80 60,85 65,85 70,85 80,85 85,85 95,85 105,85 110,85 120,85 125,85 130,85 135,85 140,85 57.5,90 62.5,90 67.5,90 72.5,90 87.5,90 97.5,90 122.5,90 127.5,90 142.5,90 92.5,91 111.252,91.313 65,95 70,95 95,95 57.5,100 62.5,100 67.5,100 72.5,100 82.5,100 87.5,100 117.5,100 132.5,100 139.192,101.036 139.192,104.592 60,105 65,105 70,105 135,105 139.192,108.148 57.5,110 62.5,110 72.5,110 77.5,110 82.5,110 92.5,110 102.5,110 117.5,110 132.5,110 60,115 65,115 70,115 95,115 130,115 135,115 140,115 145,115 57.5,120 62.5,120 67.5,120 77.5,120 82.5,120 87.5,120 92.5,120 102.5,120 112.5,120 117.5,120 127.5,120 132.5,120 142.5,120 75,125 80,125 85,125 90,125 95,125 130,125 135,125 140,125 62.5,130 72.5,130 77.5,130 82.5,130 87.5,130 92.5,130 70,135 75,135 80,135 85,135 90,135 95,135 139.192,136.001 139.192,139.557 57.5,140 72.5,140 77.5,140 82.5,140 87.5,140 92.5,140 139.192,143.113 55,145 75,145
LCD0(DB4): J1.11 U3.95 | length 48.9
  Top Layer w0.3: J1.11 66.098,108.65 71.748,114.3 93.96,114.3 96.5,111.76 U3.95
LCD1(DB5): J1.12 U3.96 | length 48.9
  Top Layer w0.3: J1.12 55.31,106.11 57.35,108.15 66.305,108.15 71.955,113.8 93.752,113.8 96,111.552 U3.96
LCD2(DB6): J1.13 U3.97 | length 49.8
  Top Layer w0.3: J1.13 56.388,104.958 56.388,106.426 57.612,107.65 66.512,107.65 72.162,113.3 93.545,113.3 95.5,111.345 U3.97
LCD3(DB7): J1.14 U3.98 | length 50.9
  Top Layer w0.3: J1.14 56.888,102.918 56.888,106.219 57.819,107.15 66.719,107.15 72.369,112.8 93.338,112.8 95,111.138 U3.98
LCD4(E): J1.6 U3.99 | length 74.3
  Top Layer w0.3: J1.6 53.594,119.944 53.594,100.457 54.356,99.695 55.626,99.695 57.388,101.457 57.388,106.012 58.026,106.65 66.926,106.65 72.576,112.3 93.131,112.3 94.5,110.931 U3.99
LCD5(RS): J1.4 U3.1 | length 55.5
  Top Layer w0.3: J1.4 57.04,124.39 70.5,124.39 72.128,122.762 72.128,116.793 73.232,115.689 84.574,115.689 85.217,116.332 86.106,116.332 v1(87.249,115.189) ; v1(87.376,111.252) 86.741,110.617 86.741,107.442 88.183,106 U3.1
  Bottom Layer w0.3: v1(87.249,115.189) 86.741,114.681 86.741,111.887 v1(87.376,111.252)
LCD6(R/W): J1.5 U3.2 | length 53.2
  Top Layer w0.3: J1.5 70.293,123.89 71.628,122.555 71.628,116.586 73.025,115.189 v1(85.725,115.189) ; v1(85.598,111.252) 86.241,110.609 86.241,107.235 87.976,105.5 U3.2
  Bottom Layer w0.3: v1(85.598,111.252) 86.233,111.887 86.233,114.681 v1(85.725,115.189)
LIM1: J2.2 U3.8 | length 120
  Top Layer w0.3: v1(89.535,104.14) 89.734,104.14 91.374,102.5 U3.8 ; v1(112.141,112.903) 113.935,114.697 126.586,114.697 127.905,113.378 127.905,95.598 132.58,90.923 132.58,71.327 133.557,70.35 145.661,70.35 146.304,70.993 146.304,73.966 J2.2
  Bottom Layer w0.3: v1(89.535,104.14) 92.583,104.14 93.379,103.344 93.379,101.634 93.882,101.131 94.586,101.131 95.955,102.5 103.533,102.5 105.021,103.988 105.021,112.751 106.967,114.697 109.458,114.697 111.252,112.903 v1(112.141,112.903)
LIM2: J5.2 U3.9 | length 114.6
  Top Layer w0.3: v1(89.535,102.743) 90.424,102.743 91.167,102 U3.9 ; v1(113.03,111.76) 113.03,113.03 114.197,114.197 126.379,114.197 127.405,113.171 127.405,95.391 132.08,90.716 132.08,71.12 133.35,69.85 141.42,69.85 J5.2
  Bottom Layer w0.3: v1(89.535,102.743) 91.563,102.743 93.675,100.631 94.793,100.631 96.162,102 103.74,102 105.521,103.781 105.521,112.544 107.174,114.197 109.251,114.197 111.688,111.76 v1(113.03,111.76)
NetC12_1: C12.1 C13.2 R6.1 U4.1 VR3.1 | length 15
  Top Layer w0.3: C13.2@122.961,70.55 R6.1 ; U4.1 127.522,67.451 128.016,67.945 128.778,67.945 129.286,68.453 129.286,69.977 128.713,70.55 127.688,70.55 VR3.1
NetC14_2: C14.2 U3.39 U3.86 | length 22.7
  Top Layer w0.3: U3.39 100.5,99.738 101,100.238 U3.86 101,112.049 102.108,113.157 C14.2@102.108,114.26
NetC17_2: C17.2 U3.63 | length 6.6
  Top Layer w0.3: U3.63 112.852,100 113.03,99.822 C17.2
NetJ1_3: J1.3 VR1.2 | length 6
  Top Layer w0.3: J1.3 56.134,130.104 56.134,130.556 56.388,130.81 58.801,130.81 59.055,131.064 VR1.2
NetJ1_15: J1.15 VR2.3 | length 3.4
  Top Layer w0.3: J1.15 56.577,98.49 57.097,97.97 VR2.3
NetJ2_1: J2.1 R1.1 | length 2.6
  Top Layer w0.3: R1.1 J2.1@144.914,72.644
NetJ4_1: J4.1 R2.1 | length 2.7
  Top Layer w0.3: R2.1 J4.1@70.104,144.976
NetJ5_1: J5.1 R5.1 | length 2.7
  Top Layer w0.3: R5.1 J5.1@144.976,63.754
NetJ10_2: J10.2 Q1.1 | length 3.1
  Top Layer w0.3: Q1.1 143.195,54.168 143.757,54.73 J10.2
NetJ11_2: J11.2 R21.2 R22.1 | length 4.9
  Top Layer w0.3: R22.1@142.178,144.926 142.178,143.148 143.129,143.148 143.847,142.43 J11.2
NetJ11_3: J11.3 R23.2 R24.1 | length 4.7
  Top Layer w0.3: R24.1@142.178,141.37 142.178,139.592 143.383,139.592 143.681,139.89 J11.3
NetJ11_4: J11.4 R25.2 R26.1 | length 4.8
  Top Layer w0.3: R25.2@142.178,136.036 142.178,137.814 143.256,137.814 143.72,137.35 J11.4
NetJ11_5: J11.5 R31.1 | length 3.1
  Top Layer w0.3: R31.1@142.178,134.258 143.256,134.258 143.808,134.81 J11.5
NetJ13_2: J13.2 R33.2 R34.1 | length 4.9
  Top Layer w0.3: R34.1 R33.2 143.129,108.148 143.847,107.43 J13.2
NetJ13_3: J13.3 R35.2 R36.1 | length 4.7
  Top Layer w0.3: R36.1 R35.2 143.383,104.592 143.681,104.89 J13.3
NetJ13_4: J13.4 R37.2 R38.1 | length 4.8
  Top Layer w0.3: R37.2 R38.1 143.256,102.814 143.72,102.35 J13.4
NetJ13_5: J13.5 R39.1 | length 3.1
  Top Layer w0.3: R39.1 143.256,99.258 143.808,99.81 J13.5
NetQ1_2: Q1.2 R28.2 R30.2 | length 6.5
  Top Layer w0.3: R28.2 139.638,55.818 139.888,56.068 Q1.2 142.17,56.712 141.67,57.212 R30.2
NetR19_1: R19.1 S1.2 U3.15 | length 14.2
  Top Layer w0.3: R19.1@82.615,93.98 83.82,93.98 84.155,94.315 84.155,96.415 84.155,98.506 84.649,99 U3.15
NetR27_1: R27.1 U5.3 | length 22.2
  Top Layer w0.3: U5.3 72.374,64.5 72.644,64.77 72.644,65.405 73.025,65.786 83.439,65.786 85.644,67.991 85.644,72.182 85.917,72.455 R27.1
NetR29_2: R29.2 S3.1 U5.12 | length 35.6
  Top Layer w0.3: U5.12 61.167,68.5 62.095,67.572 62.095,55.888 62.716,55.267 S3.1 73.96,53.112 74.367,52.705 R29.2
NetR32_1: R32.1 U5.11 | length 44.2
  Top Layer w0.3: U5.11 61.834,70.5 62.611,69.723 62.611,66.04 63.119,65.532 72.009,65.532 72.771,66.294 83.058,66.294 85.144,68.38 85.144,72.389 86.161,73.406 87.757,73.406 88.138,73.025 R32.1
NTRST: J12.5 U3.25 | length 27.6
  Top Layer w0.3: J12.5 76.581,96.266 76.581,90.788 78.398,88.971 85.141,88.971 90.17,94 U3.25
REED_COL_0: J7.1 R7.2 U3.71 | length 66.9
  Top Layer w0.3: U3.71 109.271,104 111.111,105.84 111.111,111.122 109.275,112.958 109.275,131.754 110.911,133.39 131.485,133.39 132.715,134.62 132.715,141.351 133.034,141.67 R7.2 ; R7.2@133.97,141.685 J7.1
REED_COL_1: J7.2 R8.2 U3.72 | length 63.9
  Top Layer w0.3: U3.72 109.064,104.5 110.611,106.047 110.611,110.914 110.318,111.207 108.775,112.751 108.775,131.964 110.701,133.89 129.064,133.89 130.175,135.001 130.175,141.351 130.494,141.67 R8.2 J7.2@131.445,144.985
REED_COL_2: J7.3 R9.2 U3.73 | length 60.8
  Top Layer w0.3: U3.73 108.857,105 110.111,106.254 110.111,110.707 108.275,112.544 108.275,132.171 110.494,134.39 126.389,134.39 127.635,135.636 127.635,141.351 127.954,141.67 R9.2 ; R9.2@128.89,141.685 J7.3
REED_COL_3: J7.4 R10.2 U3.74 | length 57.7
  Top Layer w0.3: U3.74 108.65,105.5 109.611,106.461 109.611,110.5 107.775,112.336 107.775,132.379 110.286,134.89 123.714,134.89 125.08,136.256 125.08,141.366 125.399,141.685 126.35,141.685 J7.4
REED_COL_4: J7.5 R11.2 U3.76 | length 51.7
  Top Layer w0.3: U3.76 106,110.592 107.275,111.867 107.275,132.586 110.079,135.39 121.293,135.39 122.555,136.652 122.555,141.351 122.874,141.67 R11.2 ; R11.2@123.81,141.685 J7.5
REED_COL_5: J7.6 R12.2 U3.77 | length 49.5
  Top Layer w0.3: U3.77 105.5,110.8 106.775,112.075 106.775,132.793 109.872,135.89 118.745,135.89 120,137.145 120,141.366 120.319,141.685 121.27,141.685 J7.6
REED_COL_6: J7.7 R13.2 U3.78 | length 47.3
  Top Layer w0.3: U3.78 105,111.007 106.275,112.282 106.275,133 109.673,136.398 116.205,136.398 117.475,137.668 117.475,141.351 117.794,141.67 R13.2 ; R13.2@118.73,141.685 J7.7
REED_COL_7: J7.8 R14.2 U3.79 | length 45.2
  Top Layer w0.3: U3.79 104.5,111.214 105.775,112.489 105.775,133.207 109.474,136.906 114.173,136.906 115.189,137.922 115.189,141.351 115.508,141.67 R14.2 ; R14.2@116.19,141.685 J7.8
REED_COL_8: J7.9 R15.2 U3.69 | length 96
  Top Layer w0.3: U3.69 109.686,103 112.111,105.426 112.111,111.536 110.275,113.372 110.275,131.34 111.325,132.39 131.899,132.39 136.009,136.5 136.009,145.749 134.954,146.804 ; R15.2@113.65,141.685 J7.9 115.462,146.812 134.954,146.812
REED_COL_9: J7.10 R16.2 U3.70 | length 107.6
  Top Layer w0.3: U3.70 109.478,103.5 111.611,105.633 111.611,111.329 111.025,111.914 109.775,113.165 109.775,131.547 111.118,132.89 131.692,132.89 135.509,136.707 135.509,145.542 134.747,146.304 115.697,146.304 114.935,145.542 114.935,144.272 114.681,144.018 114.681,138.176 114.046,137.541 112.903,137.541 112.395,138.049 112.395,141.351 112.076,141.67 R16.2 ; R16.2@111.11,141.685 J7.10
REED_COL_10: J7.11 R17.2 U3.80 | length 39.7
  Top Layer w0.3: U3.80 104,111.421 105.275,112.696 105.275,133.469 107.315,135.509 107.315,141.351 107.634,141.67 R17.2 ; R17.2@108.57,141.685 J7.11
REED_COL_11: J7.12 R18.2 U3.81 | length 38.8
  Top Layer w0.3: U3.81 103.5,111.628 104.775,112.903 104.775,141.351 105.094,141.67 R18.2 ; R18.2@106.03,141.685 J7.12
REED_ROW_0: J8.1 U3.44 | length 118.8
  Top Layer w0.3: U3.44 103,89.64 105.478,87.162 114.233,87.162 118.071,91 121.745,91 125.095,94.35 125.095,100.076 v1(125.857,100.838)
  Bottom Layer w0.3: J8.1 82.473,143.637 84.306,143.637 84.806,143.137 86.639,143.137 87.147,142.629 88.98,142.629 89.48,142.129 91.313,142.129 91.821,141.621 93.653,141.621 94.153,141.121 95.986,141.121 96.486,140.621 97.614,140.621 98.409,139.826 98.409,125.11 101.75,121.769 105.768,121.769 106.864,122.865 121.74,122.865 122.23,122.375 122.23,113.324 122.007,113.101 122.007,104.688 v1(125.857,100.838)
REED_ROW_1: J8.2 U3.45 | length 115.2
  Top Layer w0.3: U3.45 103.5,89.847 105.685,87.662 114.025,87.662 117.863,91.5 121.538,91.5 124.595,94.557 124.595,100.778 125.857,102.04 v1(125.857,102.362)
  Bottom Layer w0.3: J8.2 85.013,143.637 86.846,143.637 87.346,143.137 89.179,143.137 89.687,142.629 91.52,142.629 92.02,142.129 93.853,142.129 94.361,141.621 96.193,141.621 96.693,141.121 97.821,141.121 98.909,140.033 98.909,125.317 101.957,122.269 105.561,122.269 106.657,123.365 121.947,123.365 122.73,122.582 122.73,113.117 122.507,112.894 122.507,105.712 v1(125.857,102.362)
REED_ROW_2: J8.3 U3.46 | length 111.6
  Top Layer w0.3: U3.46 104,90.054 105.892,88.162 113.818,88.162 117.656,92 121.331,92 124.095,94.764 124.095,101.802 125.857,103.564 v1(125.857,103.886)
  Bottom Layer w0.3: J8.3 87.553,143.637 89.386,143.637 89.886,143.137 91.719,143.137 92.227,142.629 94.06,142.629 94.56,142.129 96.393,142.129 96.901,141.621 98.028,141.621 99.409,140.24 99.409,125.524 102.164,122.769 105.354,122.769 106.45,123.865 122.154,123.865 123.23,122.789 123.23,112.909 123.007,112.686 123.007,106.736 v1(125.857,103.886)
REED_ROW_3: J8.4 U3.47 | length 108
  Top Layer w0.3: U3.47 104.5,90.261 106.099,88.662 113.611,88.662 117.449,92.5 121.124,92.5 123.595,94.971 123.595,102.826 125.857,105.088 v1(125.857,105.41)
  Bottom Layer w0.3: J8.4 90.093,143.637 91.926,143.637 92.426,143.137 94.259,143.137 94.767,142.629 96.6,142.629 97.1,142.129 98.248,142.129 99.909,140.468 99.909,125.731 102.371,123.269 105.147,123.269 106.243,124.365 122.362,124.365 123.73,122.997 123.73,112.702 123.507,112.479 123.507,107.76 v1(125.857,105.41)
REED_ROW_4: J8.5 U3.48 | length 104.5
  Top Layer w0.3: U3.48 105,90.468 106.306,89.162 113.404,89.162 117.242,93 120.917,93 123.095,95.178 123.095,103.85 125.857,106.612 v1(125.857,106.934)
  Bottom Layer w0.3: J8.5 92.633,143.637 94.466,143.637 94.966,143.137 96.799,143.137 97.307,142.629 98.455,142.629 100.409,140.675 100.409,125.939 102.579,123.769 104.939,123.769 106.035,124.865 122.569,124.865 124.23,123.204 124.23,112.495 124.007,112.272 124.007,108.784 v1(125.857,106.934)
REED_ROW_5: J8.6 U3.49 | length 100.9
  Top Layer w0.3: U3.49 105.5,90.675 106.513,89.662 113.197,89.662 117.035,93.5 120.71,93.5 122.595,95.385 122.595,104.874 125.857,108.136 v1(125.857,108.458)
  Bottom Layer w0.3: J8.6 95.173,143.637 97.006,143.637 97.514,143.129 98.662,143.129 100.909,140.882 100.909,126.146 102.786,124.269 104.732,124.269 105.828,125.365 122.776,125.365 124.73,123.411 124.73,112.288 124.507,112.065 124.507,109.808 v1(125.857,108.458)
REED_ROW_6: J8.7 U3.51 | length 92.2
  Top Layer w0.3: U3.51 120.503,94 122.095,95.592 122.095,105.898 125.857,109.66 v1(125.857,109.982)
  Bottom Layer w0.3: J8.7 97.713,143.637 98.861,143.637 101.409,141.089 101.409,126.353 102.993,124.769 104.525,124.769 105.621,125.865 122.983,125.865 125.23,123.618 125.23,112.081 125.007,111.858 125.007,110.931 v1@125.857,110.081
REED_ROW_7: J8.8 U3.52 | length 89.6
  Top Layer w0.3: U3.52 120.295,94.5 121.595,95.8 121.595,106.922 125.857,111.184 v1(125.857,111.506)
  Bottom Layer w0.3: J8.8 98.89,144.315 101.909,141.296 101.909,126.56 103.2,125.269 104.318,125.269 105.414,126.365 123.19,126.365 125.73,123.825 v1@125.73,111.633
RX: J12.7 U3.28 | length 28.3
  Top Layer w0.3: J12.7 75.573,92.194 75.573,90.382 77.984,87.971 87.637,87.971 88.058,87.55 93.282,87.55 95,89.268 U3.28
SLP_1: J11.6 U3.89 | length 76.8
  Top Layer w0.3: U3.89 99.5,111.193 97.028,113.665 97.028,127.254 98.171,128.397 102.624,128.397 103.759,127.262 v1(103.759,126.619) ; v1@111.379,130.286 112.395,129.27 143.002,129.27 143.637,129.905 143.637,130.907 J11.6
  Bottom Layer w0.3: v1(103.759,126.619) 103.759,127.584 102.909,128.434 102.909,129.138 103.407,129.636 104.111,129.636 104.461,129.286 110.363,129.286 v1(111.379,130.302)
SLP_2: J13.6 U3.92 | length 88
  Top Layer w0.3: v1(94.234,105.029) 96.901,105.029 98,106.128 U3.92 ; v1(111.252,117.221) 112.276,116.197 127.207,116.197 129.405,113.999 129.405,96.219 130.394,95.23 142.96,95.23 J13.6
  Bottom Layer w0.3: v1(94.234,105.029) 95.263,104 102.912,104 103.521,104.609 103.521,113.372 106.346,116.197 110.228,116.197 v1(111.252,117.221)
STEP_1: J11.7 U3.90 | length 70.2
  Top Layer w0.3: U3.90 99,110.986 96.528,113.458 96.528,127.461 97.964,128.897 103.648,128.897 v1(103.759,128.786) ; v1@111.379,128.77 144.04,128.77 J11.7
  Bottom Layer w0.3: v1(103.759,128.786) v1@111.371,128.786
  other v1: 111.379,128.778
STEP_2: J13.7 U3.6 | length 82
  Top Layer w0.3: U3.6 v1(94.229,103.5) ; v1(111.252,115.697) 127,115.697 128.905,113.792 128.905,96.012 130.187,94.73 J13.7
  Bottom Layer w0.3: v1(94.229,103.5) 103.119,103.5 104.021,104.402 104.021,113.165 106.553,115.697 v1(111.252,115.697)
SWDCK/TCK: J12.2 U3.21 | length 33.5
  Top Layer w0.3: J12.2 78.097,102.37 78.097,91.393 79.019,90.471 84.519,90.471 90.048,96 U3.21
SWDIO/TMS: J12.1 U3.20 | length 35.5
  Top Layer w0.3: J12.1 78.597,104.41 78.597,91.6 79.226,90.971 84.312,90.971 89.841,96.5 U3.20
SWV/TDO: J12.3 U3.23 | length 31.4
  Top Layer w0.3: J12.3 77.597,100.33 77.597,91.186 78.812,89.971 84.726,89.971 89.755,95 U3.23
TDI: J12.4 U3.24 | length 29.5
  Top Layer w0.3: J12.4 77.089,98.298 77.089,90.987 78.605,89.471 84.933,89.471 89.962,94.5 U3.24
TX: J12.6 U3.27 | length 29.4
  Top Layer w0.3: J12.6 76.073,94.234 76.073,90.589 78.191,88.471 87.844,88.471 88.265,88.05 93.075,88.05 94.5,89.475 U3.27
VEM: C12.2 J10.1 R6.2 U4.2 | length 42.3
  Top Layer w0.3: U4.2 C12.2 R6.2@127.61,69.175
  Top Layer w1: U4.2 125.222,62.611 126.365,61.468 133.897,61.468 135.167,60.198 135.167,54.571 136.722,53.016 146.107,53.016 146.685,53.594 146.685,55.585 J10.1
pads on no net: S1.3 S1.4 S2.3 S2.4 S3.3 S3.4 U1.4 U2.4 U3.3 U3.4 U3.5 U3.11 U3.19 U3.22 U3.29 U3.30 U3.31 U3.32 U3.33 U3.34 U3.35 U3.36 U3.40 U3.41 U3.42 U3.43 U3.55 U3.56 U3.57 U3.58 U3.59 U3.60 U3.61 U3.62 U3.82 U3.83 U3.84 U3.85 U3.93 U3.94 U4.4

## Polygon pours and split planes (outlines as drawn)
GND on Top Layer "TOP-GND" (solid, pour order 2): 52.5,49.988 cw(c52.5,52.488) 50,52.488 50,52.5 50,147.5 49.988,147.5 cw(c52.488,147.5) 52.488,150 52.5,150 52.5,150.012 147.5,150.012 cw(c147.5,147.512) 150,147.512 150,147.5 150,52.5 150.012,52.5 cw(c147.512,52.5) 147.512,50 147.5,50
GND on Bottom Layer "BOT-GND" (solid, pour order 5): 50,52.5 50,147.5 cw(c52.5,147.5) 52.5,150 147.5,150 cw(c147.5,147.5) 150,147.5 150,52.5 cw(c147.5,52.5) 147.5,50 52.5,50 cw(c52.5,52.5)

## Silkscreen, mask and mechanical layers (free items; w line width, h text height)
Top Overlay:
  text "M1" at 144.399,146.939 h1
  text "1" at 81.158,146.778 h1
  text "2" at 83.365,146.778 h1
  text "3" at 85.905,146.778 h1
  text "4" at 88.445,146.778 h1
  text "5" at 90.985,146.778 h1
  text "6" at 93.525,146.778 h1
  text "7" at 96.065,146.778 h1
  text "8" at 98.605,146.778 h1
  text "G" at 59.563,146.558 h1
  text "4" at 62.094,146.558 h1
  text "3" at 64.634,146.558 h1
  text "2" at 67.174,146.558 h1
  text "1" at 69.841,146.558 h1
  text "12" at 105.41,146.558 h1
  text "11" at 108.077,146.558 h1
  text "10" at 110.49,146.558 h1
  text "9" at 113.284,146.558 h1
  text "8" at 115.824,146.558 h1
  text "7" at 118.491,146.558 h1
  text "6" at 120.904,146.558 h1
  text "5" at 123.444,146.558 h1
  text "4" at 125.984,146.558 h1
  text "3" at 128.524,146.558 h1
  text "2" at 131.064,146.558 h1
  text "1" at 133.731,146.558 h1
  text "E" at 57.117,144.554 h1.25
  text "R" at 78.307,144.554 h1.25
  text "C" at 103.227,144.554 h1.25
  text "G" at 146.58,144.462 h1.25
  text "1" at 146.58,141.922 h1.25
  text "2" at 146.58,139.382 h1.25
  text "3" at 146.58,136.842 h1.25
  text "LCD" at 53.594,136.017 h1
  text "4" at 146.58,134.302 h1.25
  text "1" at 52.197,133.604 h1.25
  text "5" at 146.58,131.762 h1.25
  text "2" at 52.197,131.064 h1.25
  text "6" at 146.58,129.222 h1.25
  text "3" at 52.197,128.524 h1.25
  text "7" at 146.58,126.682 h1.25
  text "4" at 52.197,125.984 h1.25
  text "G" at 146.58,124.142 h1.25
  text "5" at 52.197,123.444 h1.25
  text "5" at 146.58,121.602 h1.25
  text "6" at 52.197,120.904 h1.25
  text "G" at 146.58,119.062 h1.25
  text "7" at 52.197,118.364 h1.25
  text "V" at 146.58,116.522 h1.25
  text "8" at 52.197,115.824 h1.25
  text "9" at 52.197,113.284 h1.25
  text "M2" at 144.399,111.76 h1
  text "10" at 51.317,110.682 h1.25
  text "G" at 146.58,109.462 h1.25
  text "TMS" at 68.882,108.458 h1.25
  text "11" at 51.317,108.142 h1.25
  text "Rst" at 80.518,107.061 h1.25
  text "1" at 146.58,106.922 h1.25
  text "TCK" at 68.628,105.918 h1.25
  text "12" at 51.317,105.602 h1.25
  text "2" at 146.58,104.382 h1.25
  text "TDO" at 68.628,103.378 h1.25
  text "13" at 51.317,103.062 h1.25
  text "3" at 146.58,101.842 h1.25
  text "TDI" at 68.628,100.838 h1.25
  text "14" at 51.317,100.522 h1.25
  text "4" at 146.58,99.302 h1.25
  text "NRST" at 67.628,98.298 h1.25
  text "15" at 51.317,97.982 h1.25
  text "5" at 146.58,96.762 h1.25
  text "TX" at 69.628,95.758 h1.25
  text "16" at 51.317,95.442 h1.25
  text "6" at 146.58,94.222 h1.25
  text "RX" at 69.628,93.218 h1.25
  text "7" at 146.58,91.682 h1.25
  text "GND" at 68.628,90.678 h1.25
  text "G" at 146.58,89.142 h1.25
  text "5" at 146.58,86.602 h1.25
  text "G" at 146.58,84.062 h1.25
  text "TX" at 51.317,83.262 h1.25
  text "V" at 146.58,81.522 h1.25
  text "RX" at 51.317,80.722 h1.25
  text "L1" at 144.399,77.089 h1
  text "1" at 146.58,74.762 h1.25
  text "2" at 146.58,72.222 h1.25
  text "L2" at 144.399,68.089 h1
  text "Boot" at 74.168,65.913 h1.25
  text "Rst" at 82.423,65.913 h1.25
  text "1" at 146.58,65.762 h1.25
  text "2" at 146.58,63.222 h1.25
  text "EM" at 144.272,59.182 h1
  text "1" at 146.58,56.762 h1.25
  text "2" at 146.58,54.222 h1.25
  text "3" at 102.037,52.07 h1.25
  text "5" at 104.577,52.07 h1.25
  text "G" at 107.117,52.07 h1.25
  text "G" at 118.307,52.07 h1.25
  text "V" at 120.847,52.07 h1.25
Mechanical 1:
  the board outline again, w0.3